# Altium PCB tvac_systems_interface.PcbDoc
Units mil, origin at the board's own origin, x right, y up, seen from the top; angles counter-clockwise.
Board outline 5749.21 x 3937.01 mil, 2 copper layers (Top, Bottom); 6 components, 26 nets, 83 pads, 25 vias.
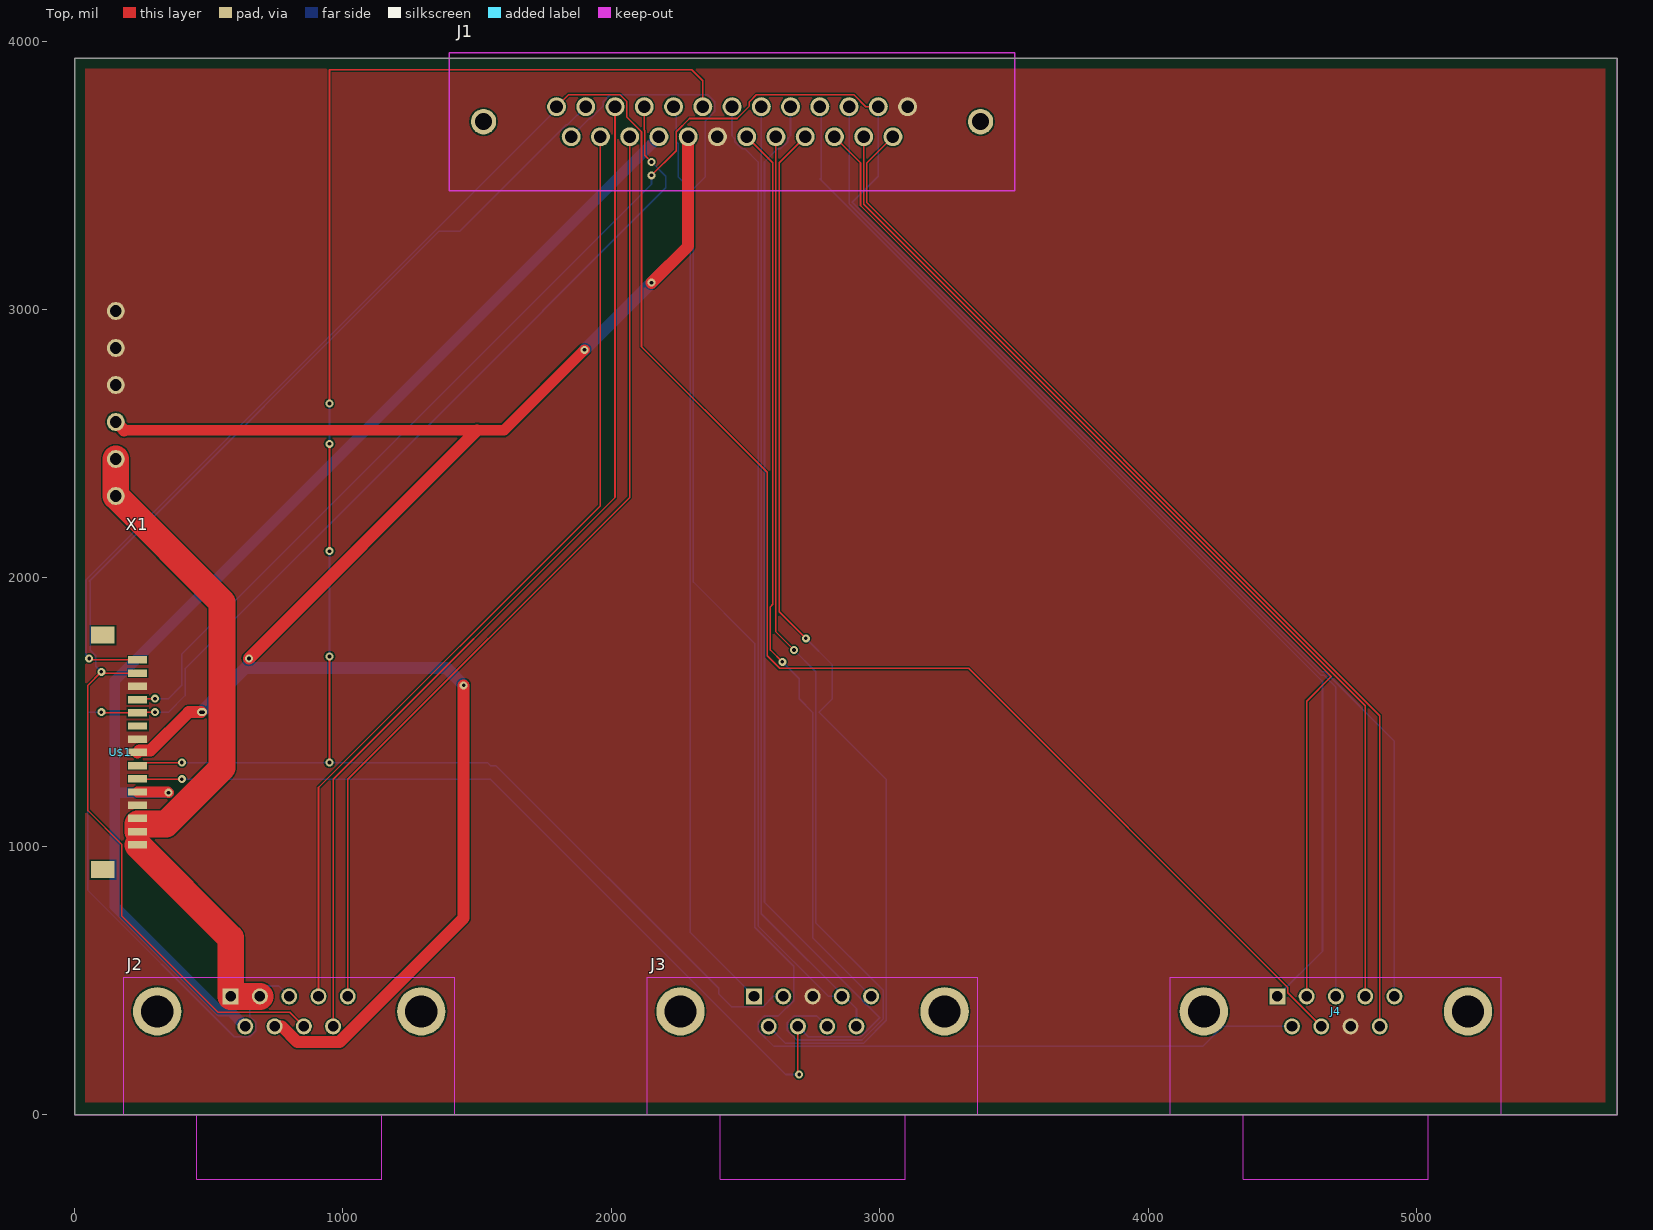
[diagram p0: Top view]
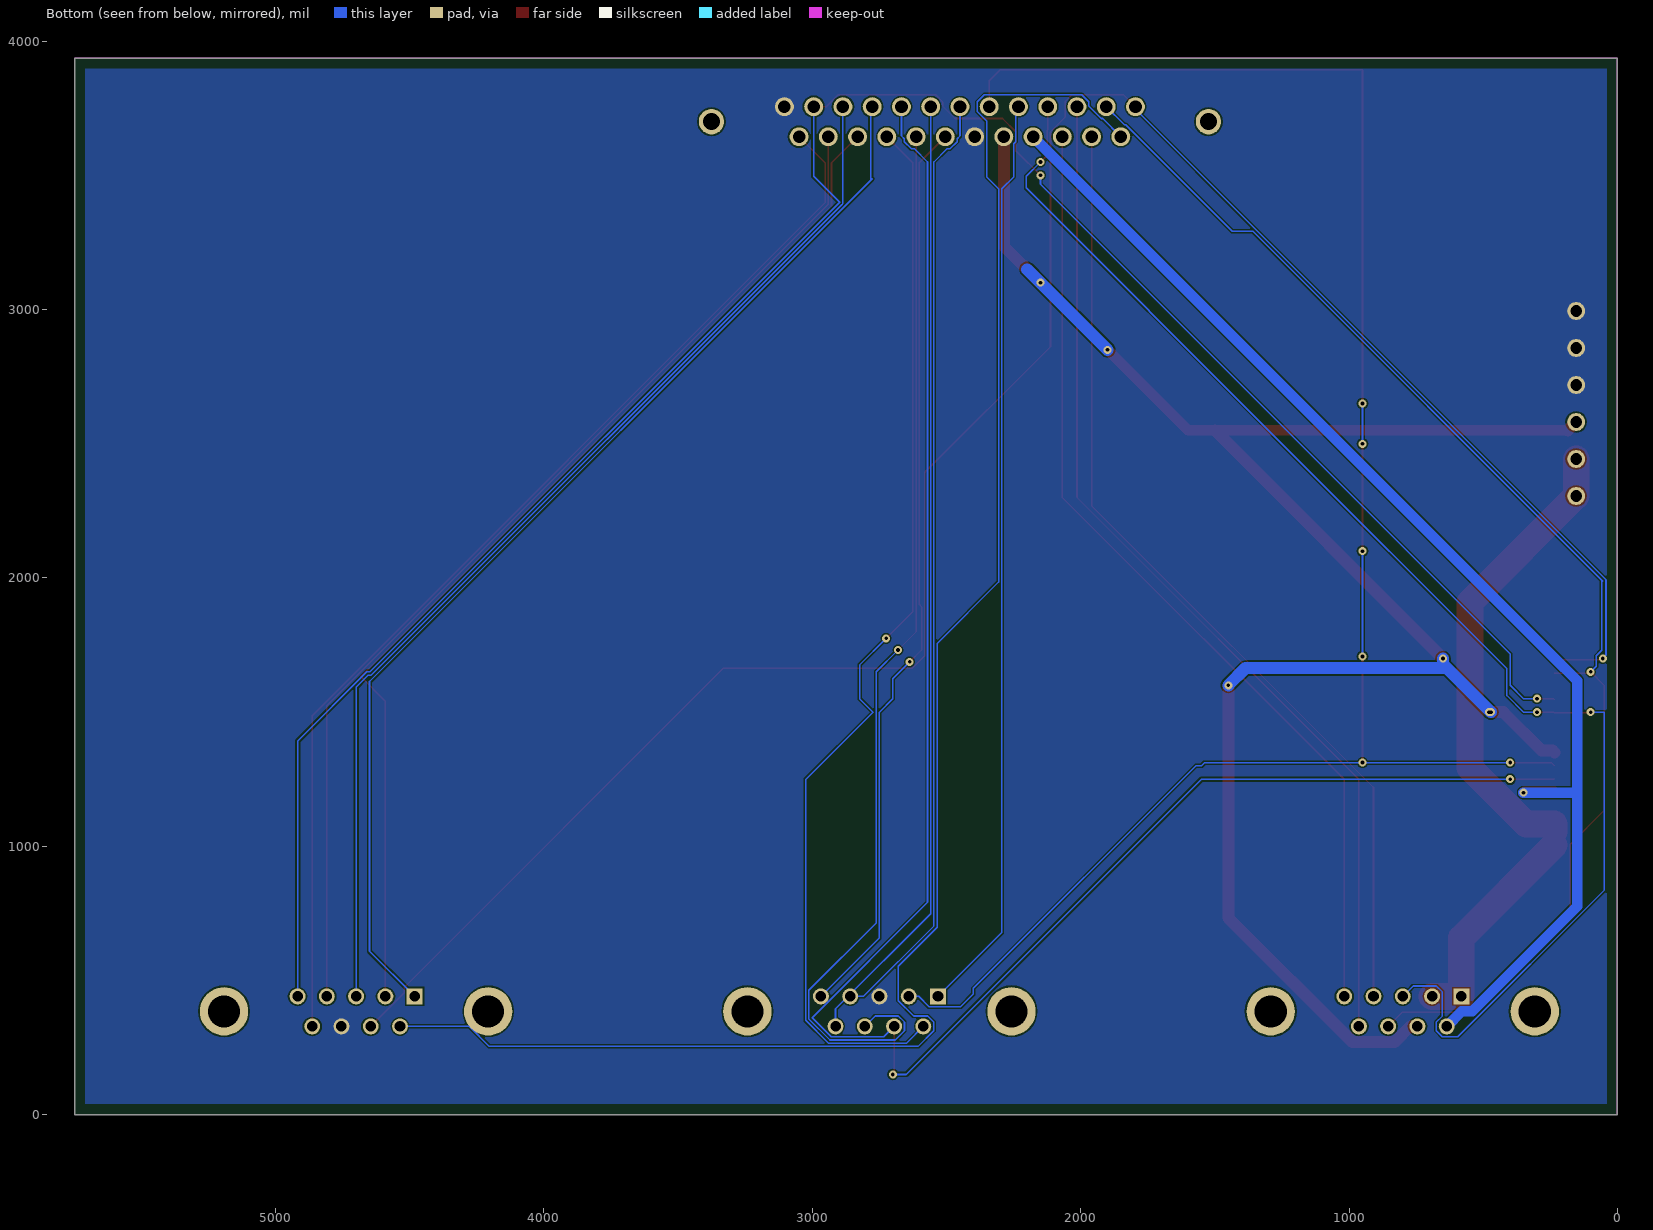
[diagram p1: Bottom view, seen from below]

## Layer stack, top to bottom
Top Solder: solder mask 0.4, Solder Resist, Dk 3.5
Top: signal copper 1.378
Dielectric 1: dielectric 12.6, FR-4, Dk 4.8
Bottom: signal copper 1.378
Bottom Solder: solder mask 0.4, Solder Resist, Dk 3.5

## Board outline
0,0 5749.21,0 5749.21,3937.01 0,3937.01

## Design rules (kind name [scope] priority, off if disabled: settings)
BoardOutlineClearance mdCopperDimension [All] p1: gap=10 ignorepadtopadclearanceinfootprint=FALSE except(0: Arc-SplitContinuation Track-SplitContinuation SMDPad-SplitContinuation THPad-SplitContinuation Via-SplitContinuation Fill-SplitContinuation Poly-SplitContinuation Region-SplitContinuation Text-SplitContinuation; 40: Poly-OutlineEdge Poly-CavityEdge Poly-CutoutEdge Poly-SplitBarrior)
Clearance "Clearance (Same Net)" [All] p1: gap=6 ignorepadtopadclearanceinfootprint=FALSE
Clearance [All] p2: gap=6 ignorepadtopadclearanceinfootprint=FALSE except(0: Arc-Poly Track-Poly SMDPad-Poly THPad-Poly Via-Poly Fill-Poly Poly-Poly Poly-Region Poly-Text; 40: Poly-Hole)
HoleSize HoleSize_For_NetClass_power [InNetClass('power')] p1: absolutevalues=TRUE maxlimit=0 minlimit=0 maxpercent=80.000 minpercent=20.000
HoleSize [All] p2: absolutevalues=TRUE maxlimit=100000 minlimit=13.78 maxpercent=80.000 minpercent=20.000
HoleToHoleClearance mdDrill [All] p1: gap=6 allowstackedmicrovias=TRUE
PasteMaskExpansion mlMinCreamFrame [All] p1: expansion=0
PolygonConnect PolygonConnect_For_PolygonThermal_OFF [InPolygonClass('PolygonThermal_OFF')] p1: connectstyle=Direct reliefconductorwidth=10 reliefentries=4 polygonreliefangle="90 Angle" airgapwidth=10
PolygonConnect ThermalVias [IsVia] p2: connectstyle=Direct reliefconductorwidth=10 reliefentries=4 polygonreliefangle="90 Angle" airgapwidth=10
PolygonConnect [All] p3: connectstyle=Relief reliefconductorwidth=10 reliefentries=4 polygonreliefangle="90 Angle" airgapwidth=10
RoutingVias [All] p1: holewidth=13.78 width=29.78 viastyle="Through Hole" minholewidth=13.78 minwidth=29.78 maxholewidth=100 maxwidth=100
SolderMaskExpansion mlMinStopFrame [All] p1: expansion=4
Width Width_For_NetClass_power [InNetClass('power')] p1: maxlimit=80 minlimit=10 preferedwidth=40
Width [All] p2: maxlimit=10000 minlimit=6 preferedwidth=6
27 further rules are at their usual default settings.

## Classes and differential pairs
polygon class PolygonThermal_OFF: Polygon_1_Net_GND Polygon_2_Net_GND
polygon class Isolate_0: Polygon_1_Net_GND Polygon_2_Net_GND
net class power: +3V3 +5V +BAT GND

## Components (designator, comment, footprint, x,y, rotation, side; value= is the part's Value field where it differs from the comment)
J1 "171-025-213R001" 171-025-213R001 2450,3700 r0 top
J2 "A-DS09A/KG-T2S" A-DS09A/KG-T2S 800,385 r0 top
J3 "A-DS09A/KG-T2S" A-DS09A/KG-T2S 2750,385 r0 top
J4 "A-DS09A/KG-T2S" A-DS09A/KG-T2S 4700,385 r0 top
U$1 "" DF13A-15P-1.25H 200,1350 r90 top
X1 "TERMINAL-BLOCK-3.5MM-6-PIN-ROUND-PAD" TERMINAL-BLOCK-6-PIN-3.5MM-ROUND-PAD 150,2650 r90 top

## Footprints (in the part's own frame and the unit in brackets; to place one, negate y for a bottom-side part, rotate by r counter-clockwise, add the part's x,y. Pads: shape width x height; smd on the part's side, far side on the other; paste and mask are expansions set on the pad)
171-025-213R001 [mil] "171-025-213R001"
  round 70.5 / inner round 60 / far side round 70.5 hole 47: 1(654,56) 2(545,56) 3(436,56) 4(327,56) 5(218,56) 6(109,56) 7(0,56) 8(-109,56) 9(-218,56) 10(-327,56) 11(-436,56) 12(-545,56) 13(-654,56) 14(599.5,-56) 15(490.5,-56) 16(381.5,-56) 17(272.5,-56) 18(163.5,-56) 19(54.5,-56) 20(-54.5,-56) 21(-163.5,-56) 22(-272.5,-56) 23(-381.5,-56) 24(-490.5,-56) 25(-599.5,-56)
  round 94.5 / inner round 60 / far side round 94.5 hole 63: P$1(-926,0) P$2(926,0)
  Top keep-out lines w5: -1053.3,-257.8 -1053.3,257.8 1053.3,257.8 1053.3,-257.8 -1053.3,-257.8
A-DS09A/KG-T2S [mm] "A-DS09A/KG-T2S"
  rect 1.508x1.508 / inner rect 1.524x1.524 / far side rect 1.508x1.508 hole 1: 1(-5.54,1.42)
  round 1.508 / inner round 1.524 / far side round 1.508 hole 1: 2(-2.77,1.42) 3(0,1.42) 4(2.77,1.42) 5(5.54,1.42) 6(4.155,-1.42) 7(1.385,-1.42) 8(-1.385,-1.42) 9(-4.155,-1.42)
  round 4.575 / inner round 1.524 / far side round 4.575 hole 3.05: P$1(-12.495,0) P$2(12.495,0)
  Top keep-out lines w0.05: -15.655,-9.75 -8.75,-9.75 -8.75,-15.875 8.75,-15.875 8.75,-9.75 15.655,-9.75 15.655,3.25 -15.655,3.25 -15.655,-9.75
DF13A-15P-1.25H [mm] "DF13A-15P-1.25H"
  rect 1.6x2.2 smd: M$0(-11.1,2.4) M$1(11.1,2.4)
  rect 0.7x1.8 smd: P$1(-8.75,-0.9) P$2(-7.5,-0.9) P$3(-6.25,-0.9) P$4(-5,-0.9) P$5(-3.75,-0.9) P$6(-2.5,-0.9) P$7(-1.25,-0.9) P$8(0,-0.9) P$9(1.25,-0.9) P$10(2.5,-0.9) P$11(3.75,-0.9) P$12(5,-0.9) P$13(6.25,-0.9) P$14(7.5,-0.9) P$15(8.75,-0.9)
TERMINAL-BLOCK-6-PIN-3.5MM-ROUND-PAD [mil] "TERMINAL-BLOCK-6-PIN-3.5MM-ROUND-PAD"
  round 66.93 / inner round 60 / far side round 66.93 hole 43.31: 1(-344.49,-3.94) 2(-206.69,-3.94) 3(-68.9,-3.94) 4(68.9,-3.94) 5(206.69,-3.94) 6(344.49,-3.94)

## Part data
U$1: library part DF13A-15P-1.25H, PackageName=DF13A-15P-1.25H
X1: library part TERMINAL-BLOCK-6-PIN-3.5MM-ROUND-PAD, PackageName=TERMINAL-BLOCK-6-PIN-3.5MM-ROUND-PAD
J1: PackageName=171-025-213R001
J2 J3 J4: PackageName=A-DS09A/KG-T2S

## Via types
v1: diameter 29.78/29.78 (per signal layer), hole 13.78, Top to Bottom, 25 vias

## Nets (pads, with @x,y where several pads share a name; then routed paths per layer and width w, separated by ;. In a path a pad name is that pad's centre, name@x,y a point inside that pad or via, vN(x,y) a via of type N, cw(c..) or ccw(c..) an arc to the next point about the centre after c; other vN are vias at no path point)
+3V3: J1.21 J2.8 U$1.P$8 X1.3 | length 7310
  Top w40: 185.04,2550 1500,2550 1600,2550 v1(1900,2850)
  Top w45: X1.3 185.04,2550 ; U$1.P$8 242.37,1356.93 282.67,1356.93 425.74,1500 v1(471.5,1500) ; v1(650,1700) 1500,2550 ; J2.8 772.24,329.09 830.43,270.91 987.68,270.91 1450,733.23 v1(1450,1600) ; v1(2150,3100) 2286.5,3236.5 J1.21
  Bottom w45: v1(471.5,1500) 635.75,1664.25 ; v1(650,1700) 650,1678.5 635.75,1664.25 ; v1(1450,1600) 1385.75,1664.25 635.75,1664.25 ; v1(1900,2850) v1(2150,3100) 2200,3150
  other v1: 479.11,1500
+5V: J1.22 J2.9 U$1.P$5 | length 4694.5
  Top w40: U$1.P$5 347.64,1202.36 v1(350,1200)
  Bottom w40: v1(350,1200) 150,1200 ; J2.9 580.29,385.22 541.44,385.22 150,776.66 150,1200 ; J1.22 241.75,1708.25 150,1616.5 150,1200
+BAT: J2.1 J2.2 U$1.P$1 U$1.P$2 U$1.P$3 X1.1 X1.2 | length 2561.9
  Top w100: X1.2 X1.1 550,1909.45 550,1292.52 340.85,1083.37 235.43,1083.37 U$1.P$2 ; U$1.P$1 581.89,659.06 J2.1 J2.2
+PACK: J1.24 J2.4 | length 3638.2
  Top w6: J2.4 909.06,1219 1959.5,2269.44 J1.24
C_GATE: J1.16 J4.2 | length 4008.2
  Top w6: J1.16 2928.5,3547 2928.5,3387.56 4683.03,1633.03 4590.94,1540.94 J4.2
CANH: J1.12 J2.7 U$1.P$14 | length 4909.7
  Top w6: U$1.P$14 104.72,1645.28 v1(100,1650) 50,1600 50,1133.62 176.43,1007.19 176.43,740.13 534.66,381.91 801.72,381.91 J2.7
  Bottom w6: 55,1988.03 58.49,1991.51 ; v1(100,1650) 78.78,1671.22 78.78,1709.9 58.49,1730.19 58.49,1991.51 ; J1.12 1837.25,3688.25 1832.17,3688.25 1435.44,3291.51 1358.49,3291.51 58.49,1991.51
CANL: J1.13 J4.8 U$1.P$15 | length 8200.5
  Top w6: v1(54.89,1700) 50,1700 55.51,1694.49 U$1.P$15 ; J1.13 1840.25,3800.25 1923.33,3800.25 1923.58,3800 1995.42,3800 1995.67,3800.25 2032.33,3800.25 2058.25,3774.33 2058.25,3716.83 2112.75,3662.33 2112.75,2861.82 2580.97,2393.6 2580.97,1709.88 2627.42,1663.43 3331.46,1663.43 4520.57,474.32 4520.57,453.99 J4.8
  Bottom w6: v1(54.89,1700) 43,1711.89 43,1993 1796,3746 J1.13
D_GATE: J1.17 J3.9 | length 4039
  Top w6: J1.17 2625.5,3547 2625.5,1874.5 v1(2725,1775)
  Bottom w6: J3.9 2649.1,266.41 2939.55,266.41 3024.87,351.73 3024.87,1249.13 2774,1500 2824,1550 2824,1676 v1(2725,1775)
DIS_TRANS_UARTN: J1.23 J2.5 | length 3638.2
  Top w6: J2.5 1018.11,1249.61 2068.5,2300 J1.23
EPS_MOSI_A/TX: J1.3 J4.3 | length 4073.5
  Bottom w6: J1.3 2886,3395.03 2890.51,3390.51 4643.03,1638 4654.97,1638 4700,1592.97 J4.3
EPS_RST: J1.5 J3.8 U$1.P$6 | length 7071.8
  Top w6: U$1.P$6 237.01,1250 v1(400,1250) ; J3.8 2695.47,154.53 v1(2700,150)
  Bottom w6: v1(400,1250) 1550,1250 2650,150 v1(2700,150) ; J1.5 2668,3647 2657.75,3636.75 2657.75,3625.67 2631.83,3599.75 2620.75,3599.75 2571,3550 2571,791.55 3000.87,361.68 2929.61,290.41 2734.16,290.41 J3.8
EPS_SCK_A/TX: J1.4 J4.1 | length 4167.7
  Bottom w6: 2777,3487.06 2782.03,3482.03 ; J1.4 2782.03,3750.97 2782.03,3482.03 ; J4.1 4650,609.02 4650,1614.06 2782.03,3482.03
GND: J1.1 J1.20 J3.3 J4.7 U$1.P$4 U$1.P$9 U$1.P$13 X1.4 X1.5 X1.6
MISO_A: J1.2 J4.5 U$1.P$12 | length 8048.7
  Top w6: U$1.P$12 238.58,1550 v1(300,1550) ; v1(2150,3500) 2242.25,3592.25 2242.25,3662.33 2291.67,3711.75 2468.33,3711.75 2514.75,3758.17 2514.75,3774.33 2540.67,3800.25 2904.33,3800.25 2948.58,3756 J1.2
  Bottom w6: v1(300,1550) 350,1550 400,1600 400,1716.97 2150,3466.97 v1(2150,3500) ; J1.2 2995,3497 2898,3400 4648,1650 4659.94,1650 4918.11,1391.83 J4.5
OBC_MOSI_A/TX: J1.6 J3.6 | length 3573.8
  Bottom w6: J1.6 2559,749.03 2913.58,394.45 J3.6
OBC_RST: J1.8 J3.2 U$1.P$7 | length 6909.8
  Top w6: U$1.P$7 246.65,1312 v1(400,1312) ; v1(950,1312) v1(950,1707.64) ; v1(950,2100) v1(950,2500) ; v1(950,2650) 950,3894.01 2300,3894.01 2341,3853.01 J1.8
  Bottom w6: v1(400,1312) v1(950,1312) 1538,1312 1550,1300 1570.71,1300 2400,470.71 2400,450 2447.78,402.22 2565.3,402.22 2603.99,440.91 J3.2 ; v1@950,1700 v1(950,1707.64) v1(950,2100) ; v1(950,2500) v1(950,2650)
OBC_SCK_A/TX: J1.7 J3.4 | length 3520.3
  Bottom w6: J1.7 2450,3647 2460.25,3636.75 2460.25,3625.67 2486.17,3599.75 2497.25,3599.75 2547,3550 2547,702.96 2809.06,440.91 J3.4
PAY_MISO_A/TX: U$1.P$10
PAY_MOSI_A/TX: J1.9 J3.1 | length 3439.3
  Bottom w6: J1.9 2242.25,3745.75 2242.25,3625.67 2250,3617.92 2250,3494 2294,3450 2294,678.8 J3.1
PAY_RST: J1.11 J2.6 | length 3862
  Top w6: J2.6 963.58,1249.58 2014,2300 J1.11
PAY_SCK_A/TX: J1.10 J2.3 U$1.P$11 | length 5210.2
  Top w6: v1(100,1500) 102.36,1497.64 U$1.P$11 237.8,1500 v1(300,1500) ; J1.10 2123,3669.05 2124.75,3667.3 2124.75,3575.25 v1(2150,3550)
  Bottom w6: v1(100,1500) 50,1500 50,835.64 595.23,290.41 652.44,290.41 675.1,313.07 675.1,345.12 652.26,367.96 652.26,456.93 674.92,479.59 761.32,479.59 J2.3 ; v1(300,1500) 350,1500 412,1562 412,1661.24 1285.89,2535.13 1285.89,2535.89 2203.51,3453.51 2203.51,3496.49 v1(2150,3550)
RELEASE_A: J1.18 J3.7 | length 4060.8
  Top w6: J1.18 2613.5,1798.82 v1(2681.16,1731.16)
  Bottom w6: v1(2681.16,1731.16) 2762,1650.32 2762,714.28 3012.87,463.41 3012.87,356.7 2934.58,278.41 2691.45,278.41 2656.79,313.07 2656.79,345.12 2679.45,367.78 2765.84,367.78 J3.7
RELEASE_B: J1.19 J3.5 | length 3402.2
  Top w6: J1.19 2601.5,3547 2601.5,1901.5 2592.97,1892.97 2592.97,1731.67 v1(2637.32,1687.32)
  Bottom w6: v1(2637.32,1687.32) 2700,1624.64 2700,1550 2750,1500 2750,659.02 J3.5
RTC_VBATT: J1.25 J4.9 | length 6397.6
  Bottom w6: J1.25 1918.25,3711.75 1923.33,3711.75 1969.75,3758.17 1969.75,3774.33 1995.67,3800.25 2359.33,3800.25 2385.25,3774.33 2385.25,3737.67 2350,3702.42 2350,3494 2306,3450 2306,1984.85 2535,1755.85 2535,697.99 2679.63,553.36 2679.63,424.88 2622.53,367.78 2570.39,367.78 2547.73,345.12 2547.73,313.07 2606.39,254.41 4203.4,254.41 4278.09,329.09 J4.9
TRANS_I2C_SCL: J1.15 J4.4 | length 3977.1
  Top w6: J1.15 2940.5,3392.53 4809.06,1523.97 J4.4
TRANS_I2C_SDA: J1.14 J4.6 | length 4146.7
  Top w6: J1.14 2952.5,3547 2952.5,3397.5 4863.58,1486.42 J4.6
pads on no net: J1.P$1 J1.P$2 J2.P$1 J2.P$2 J3.P$1 J3.P$2 J4.P$1 J4.P$2 U$1.M$0 U$1.M$1

## Polygon pours and split planes (outlines as drawn)
GND on Top "Polygon_1_Net_GND" (solid, remove dead copper, pour order 0): -3,3903 5703,3903 5703,47 5650,47 -3,47 -3,150
GND on Bottom "Polygon_2_Net_GND" (solid, remove dead copper, pour order 1): 50,3953 5753,3953 5753,-3 5700,-3 -3,-3 -3,50 -3,3953

## Keep-outs
Keep-Out Layer:
  the board outline again, w0

## Silkscreen, mask and mechanical layers (free items; w line width, h text height)
Dimension:
  the board outline again, w0
Unrouted:
  lines w0: 235.43,1005.51 235.43,1054.72 235.43,1103.94 ; 471.5,1500 479.11,1500

## Text inside footprints (layer, text, board x,y; h text height)
X1: Top Assembly "6" at 62.5,2975.3 h42.5 r90; Top Assembly "5" at 62.5,2837.8 h42.5 r90; Top Assembly "4" at 62.5,2700.3 h42.5 r90; Top Assembly "3" at 62.5,2562.8 h42.5 r90; Top Assembly "2" at 62.5,2425.3 h42.5 r90; Top Assembly "1" at 62.5,2287.8 h42.5 r90